# Altium PCB PCB2.PcbDoc
Units mil, origin at the board's own origin, x right, y up, seen from the top; angles counter-clockwise.
Board outline 6000 x 4000 mil, 2 copper layers (Top Layer, Bottom Layer); 30 components, 20 nets, 126 pads, 1 vias.
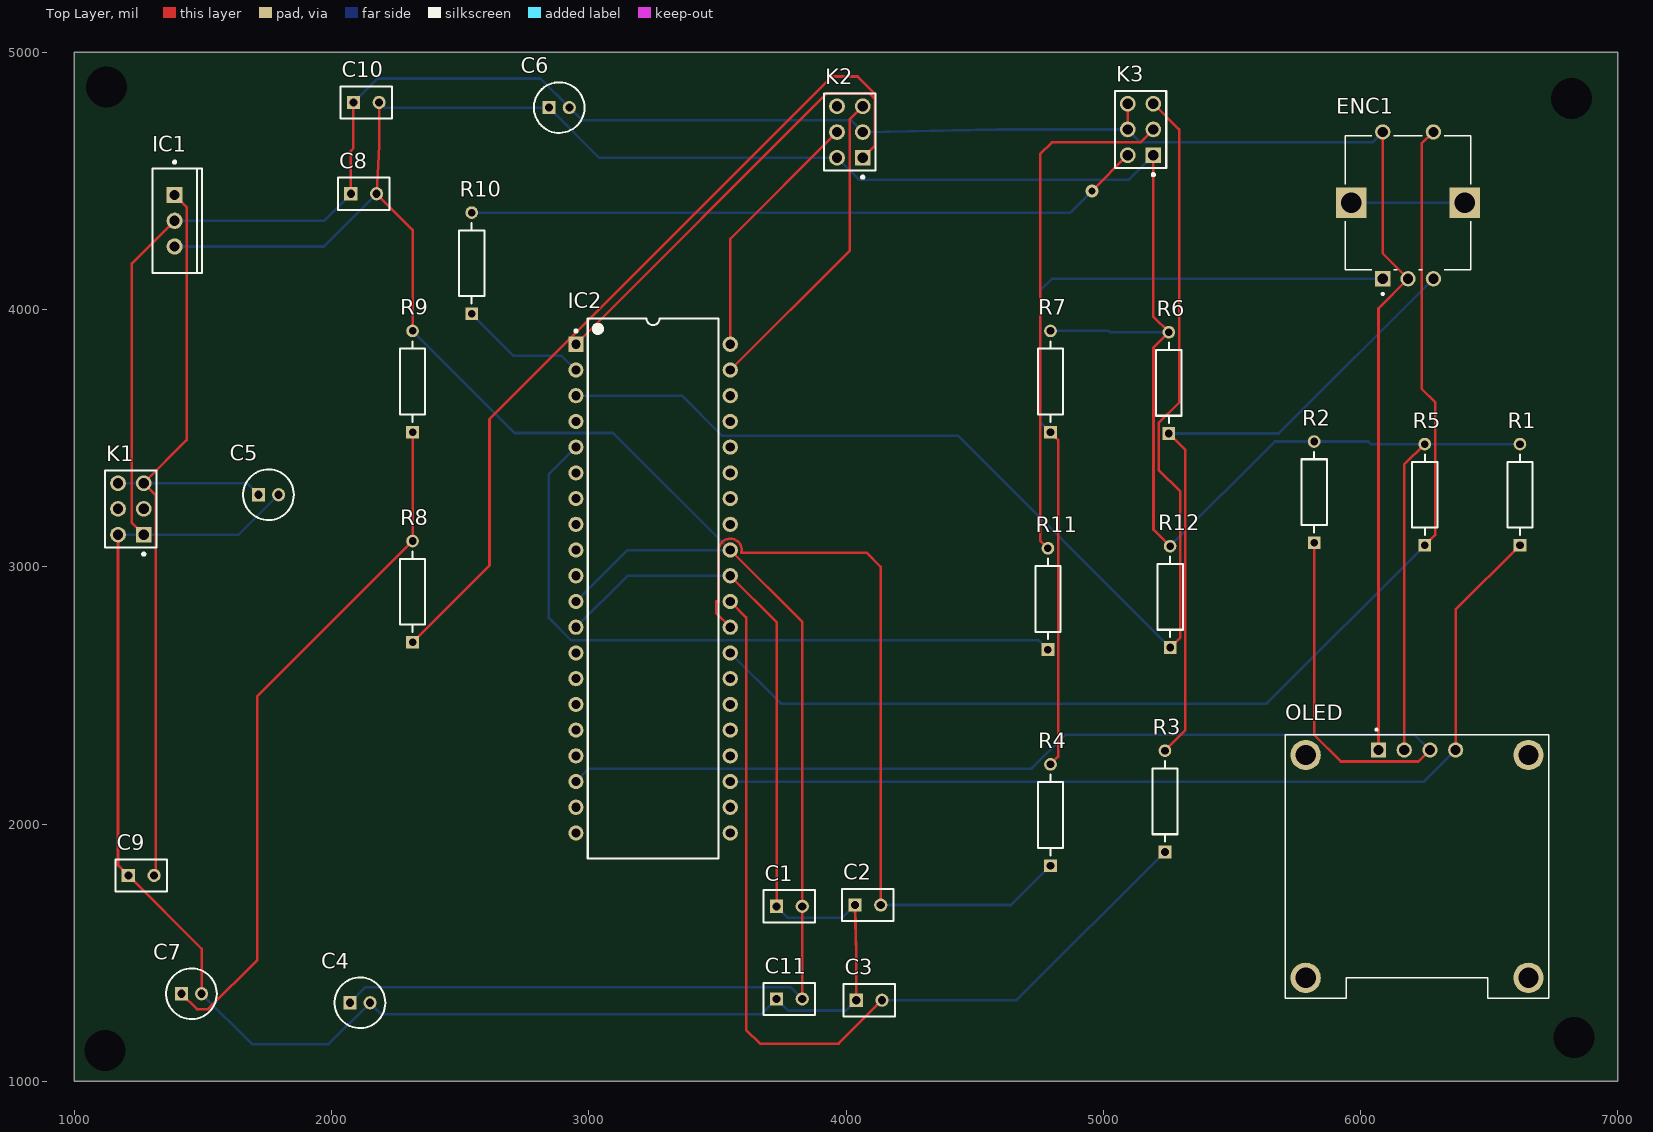
[diagram p0: Top Layer view]
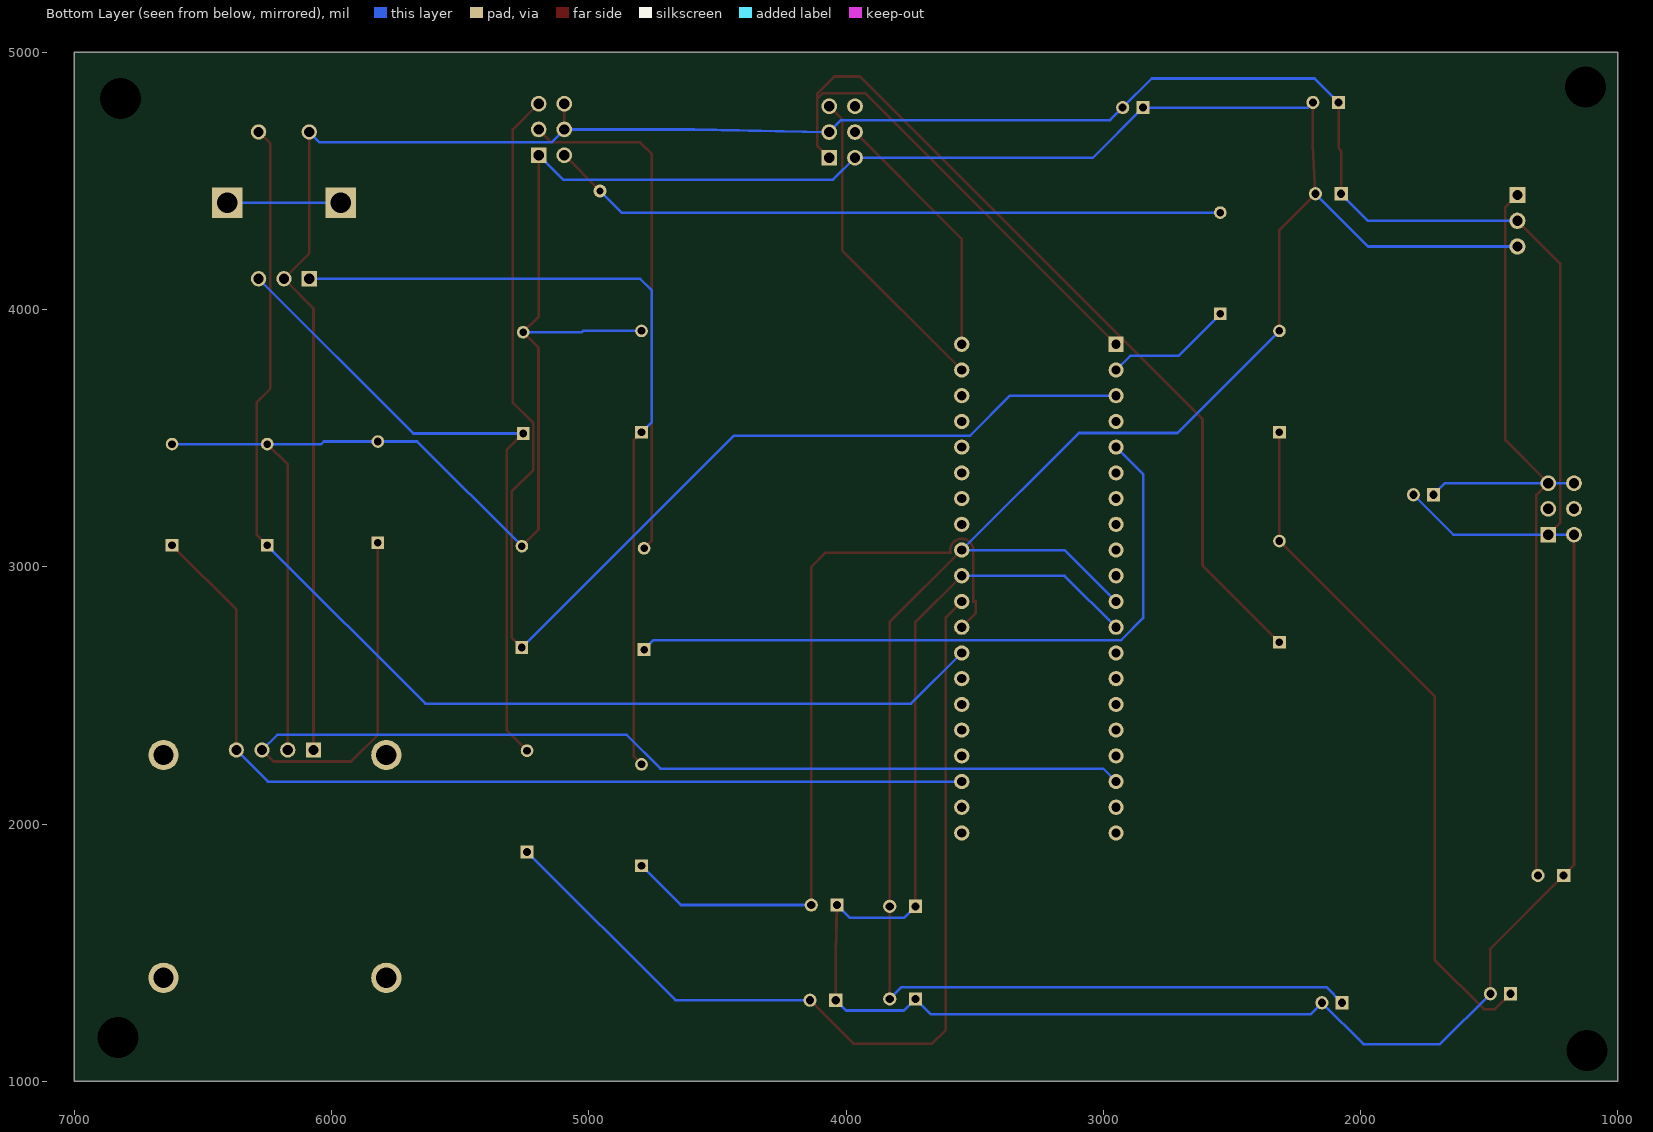
[diagram p1: Bottom Layer view, seen from below]
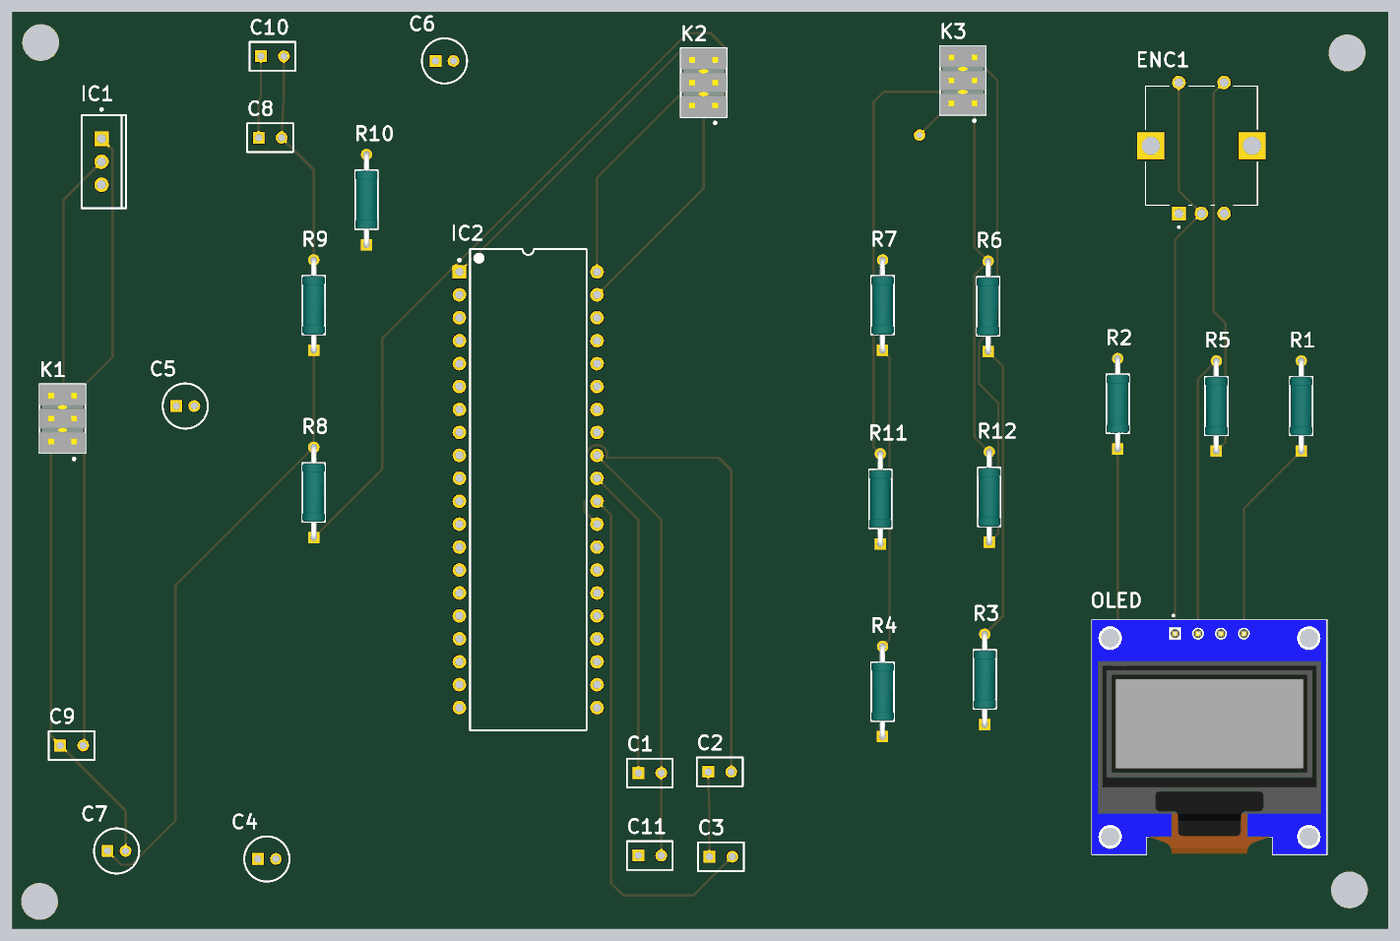
[diagram p2: 3D render of the assembled board from above, using the file's embedded part models]

## Layer stack, top to bottom
Top Solder: solder mask 0.4, Solder Resist, Dk 3.5
Top Layer: signal copper 1.4
Dielectric 1: dielectric 12.6, FR-4, Dk 4.8
Bottom Layer: signal copper 1.4
Bottom Solder: solder mask 0.4, Solder Resist, Dk 3.5

## Board outline
1000,1000 7000,1000 7000,5000 1000,5000

## Design rules (kind name [scope] priority, off if disabled: settings)
Clearance [All] p1: gap=10 ignorepadtopadclearanceinfootprint=FALSE
HoleSize [All] p1: absolutevalues=TRUE maxlimit=200 minlimit=1 maxpercent=80.000 minpercent=20.000
PolygonConnect [All] p1: connectstyle=Relief reliefconductorwidth=10 reliefentries=4 polygonreliefangle="90 Angle" airgapwidth=10
RoutingVias [All] p1: holewidth=28 width=50 viastyle="Through Hole" minholewidth=28 minwidth=50 maxholewidth=28 maxwidth=50
SolderMaskExpansion [All] p1: expansion=4 istentingtop=FALSE
Width [All] p1: maxlimit=10 minlimit=10 preferedwidth=10
29 further rules are at their usual default settings.

## Components (designator, comment, footprint, x,y, rotation, side; value= is the part's Value field where it differs from the comment)
C1 "100nF" "Capacitor 100nF" 3780,1680 r0 top
C2 "100nF" "Capacitor 100nF" 4085,1685 r0 top
C3 "100nF" "Capacitor 100nF" 4090,1315 r0 top
C4 "10µF" "Capacitor 10µF" 2110.63,1305 r0 top
C5 "10µF" "Capacitor 10µF" 1755,3280 r0 top
C6 "10µF" "Capacitor 10µF" 2885,4785 r0 top
C7 "1µF" "Capacitor 10µF" 1455.63,1340 r0 top
C8 "100nF" "Capacitor 100nF" 2125,4450 r0 top
C9 "100nF" "Capacitor 100nF" 1260,1800 r0 top
C10 "100nF" "Capacitor 100nF" 2135,4805 r0 top
C11 "100nF" "Capacitor 100nF" 3780,1320 r0 top
ENC1 "EC12E2424407" ENC1_PCB 6185,4415 r0 top
IC1 "7805" MC7805CTG 1390,4345 r0 top
IC2 "PIC18F45K22-E/P" PIC18F45K22-E/P 3250,2915 r0 top
K1 "" Pin3x2 1220,3225 r90 top
K2 "TSW-103-08-L-D" Pin3x2 4015,4690 r90 top
K3 "TSW-103-08-L-D" Pin3x2 5145,4700 r90 top
OLED "OLED" OLED 6220,1835 r0 top
R1 "4K7" Resistor 6620,3280 r90 top
R2 "4K7" Resistor 5820,3290 r90 top
R3 "4K7" Resistor 5240,2088.15 r90 top
R4 "4K7" Resistor 4795,2035 r90 top
R5 "4K7" Resistor 6250,3280 r90 top
R6 "4K7" Resistor 5255,3715 r90 top
R7 "4K7" Resistor 4795,3720 r90 top
R8 "1K" Resistor 2315,2903.15 r90 top
R9 "1K" Resistor 2315,3720 r90 top
R10 "1K" Resistor 2545,4180 r90 top
R11 "3K3" Resistor 4785,2875 r90 top
R12 "10K" Resistor 5260,2883.15 r90 top

## Footprints (in the part's own frame and the unit in brackets; to place one, negate y for a bottom-side part, rotate by r counter-clockwise, add the part's x,y. Pads: shape width x height; smd on the part's side, far side on the other; paste and mask are expansions set on the pad)
"Capacitor 10µF" [mm] "THD, 2-Leads, Dia 5mm, Body Length 11mm"
  rect 1.3x1.3 hole 0.8: 1(-1,0)
  round 1.3 hole 0.8: 2(1,0)
  silkscreen extent -2.5,-2.5 2.5,2.5, body extent -2.5,-2.5 2.5,2.5, height 12
"Capacitor 100nF" [mm] "THD, 2-Leads, Body 5.08x3.18mm"
  rect 1.3x1.3 hole 0.8: 1(-1.27,0)
  round 1.3 hole 0.8: 2(1.27,0)
  silkscreen extent -2.54,-1.59 2.54,1.59, body extent -2.54,-1.59 2.54,1.59, height 7.36
ENC1_PCB [mm]
  rect 1.508x1.508 hole 1: A(-2.5,-7.5)
  round 1.508 hole 1: B(2.5,-7.5) C(0,-7.5) D(-2.5,7) E(2.5,7)
  rect 3x3 hole 2: S1(-5.6,0) S2(5.6,0)
  silkscreen extent -6.2,-9.1 6.2,6.6
MC7805CTG [mm] "FM, 3-Leads, Body 10.3x4.85mm, Pitch 2.54mm"
  rect 1.6x1.6 hole 1: 1(0,2.54)
  round 1.6 hole 1: 2(0,0) 3(0,-2.54)
  silkscreen extent -2.19,-5.15 2.72,5.92, body extent -2.16,-5.15 2.69,5.15, height 19.68
OLED [mm] "MODULE_DM-OLED096-636"
  rect 1.508x1.508 / inner round 1.508 / far side rect 1.508x1.508 hole 1: 1(-3.81,11.5)
  round 1.508 hole 1: 2(-1.27,11.5) 3(1.27,11.5) 4(3.81,11.5)
  round 3 hole 2: S1(-11,11) S2(11,11) S3(11,-11) S4(-11,-11)
  silkscreen extent -13,-13 13,13.6, body extent -13,-13 13,13, height 5.66
PIC18F45K22-E/P [mm] "PDIP, 40-Leads, Body 51.75x13.53mm, Pitch 2.54mm"
  rect 1.5x1.5 hole 0.9: 1(-7.62,24.13)
  round 1.5 hole 0.9: 2(-7.62,21.59) 3(-7.62,19.05) 4(-7.62,16.51) 5(-7.62,13.97) 6(-7.62,11.43) 7(-7.62,8.89) 8(-7.62,6.35) 9(-7.62,3.81) 10(-7.62,1.27) 11(-7.62,-1.27) 12(-7.62,-3.81) 13(-7.62,-6.35) 14(-7.62,-8.89) 15(-7.62,-11.43) 16(-7.62,-13.97) 17(-7.62,-16.51) 18(-7.62,-19.05) 19(-7.62,-21.59) 20(-7.62,-24.13) 21(7.62,-24.13) 22(7.62,-21.59) 23(7.62,-19.05) 24(7.62,-16.51) 25(7.62,-13.97) 26(7.62,-11.43) 27(7.62,-8.89) 28(7.62,-6.35) 29(7.62,-3.81) 30(7.62,-1.27) 31(7.62,1.27) 32(7.62,3.81) 33(7.62,6.35) 34(7.62,8.89) 35(7.62,11.43) 36(7.62,13.97) 37(7.62,16.51) 38(7.62,19.05) 39(7.62,21.59) 40(7.62,24.13)
  silkscreen extent -7.74,-26.65 6.45,26.65, body extent -7.76,-26.6 7.76,26.6, height 6.35
Pin3x2 [mm] "CONN, 6-Leads, Body 7.62x5.08mm, Pitch 2.54mm"
  rect 1.55x1.55 hole 1.02: 1(-2.54,-1.27)
  round 1.55 hole 1.02: 2(-2.54,1.27) 3(0,-1.27) 4(0,1.27) 5(2.54,-1.27) 6(2.54,1.27)
  silkscreen extent -4.58,-2.54 3.81,2.54, body extent -3.81,-2.54 3.81,2.54, height 8.38
Resistor [mm]
  rect 1.25x1.25 hole 0.75 paste-2539.97 mask+0: 1(-5,0)
  round 1.25 hole 0.75 paste-2539.97 mask+0: 2(5,0)
  silkscreen extent -3.97,-1.25 3.97,1.25, body extent -5.72,-1.35 5.72,1.35, height 0.25

## Part data
C1 C2 C3 C8 C9 C10 C11: library part "Capacitor 100nF", "Radial Leaded Multilayer Ceramic Capacitor, 0.1 uF, +/- 10%, 50 V, -55 to 125 degC, 2-Pin THD, RoHS, Tape and Reel", Case\Package=SOT-23-5, Dropout Voltage="260 mV", Max Input Voltage="8 V", Max Operating Temperature="85 degC", Max Power Dissipation="250 mW", Min Operating Temperature="-40 degC", Output Current="150 mA", Output Voltage="5 V", Package Quantity=3000, ComponentLink1Description="Manufacturer URL", ComponentLink1URL=http://www.kemet.com/, ComponentLink2Description=Datasheet, ComponentLink2URL=http://www.kemet.com/docfinder?Partnumber=C320C104K5R5TA, DatasheetVersion=Dec-15, Height="1.3 mm", Length="3 mm", Mount="Surface Mount", Outputs=1, PackageDescription="2-Pin Through Hole Device, Body 5.08 x 3.18 mm, Pitch 2.54 mm", PackageReference=CAPR51-254-508X318X736, Packaging="Tape and Reel", Pins=5, Radiation Hardening=No, RoHSCompliant=true, Width="1.8 mm"
C4 C5 C6: library part "Capacitor 10µF", "Aluminum Electrolytic Capacitor, 10 uF, +/- 20%, 50 V, -40 to 85 degC, 2-Pin THD, RoHS, Bulk", Capacitance=10uF, Case/Package=Radial, Dielectric Material=Aluminium, Leakage Current=3uA, Manufacturer=Panasonic, Max Operating Temperature=85degC, Min Operating Temperature=-40degC, Package Description="2-Pin Radial Lead, Dia 5 mm, Height 12 mm", Package Quantity=200, Package Reference=CAPPR55-200-1100X500X1200, Ripple Current=65mA, Tolerance=20%, Voltage=50V, Datasheet URL=https://industrial.panasonic.com/cdbs/www-data/pdf/RDF0000/ABA0000C1218.pdf, Datasheet Version="Rev. 05, 10/2016", Diameter=5mm, Dissipation Factor=0.12%, Height=11mm, Height - Seated (Max)=0.472inch, Lead Diameter=0.5mm, Lead Free=LeadFree, Lead Pitch=2mm, Lead/Base Style=Straight, Length=11mm, Life (Hours)=2000Hour, Manufacturer URL=http://www.panasonic.com/, Mount=ThroughHole, Number of Pins=2, Packaging=Bulk, Radiation Hardening=No, REACH SVHC=NoSVHC, Ripple Current (AC)=65mA, RoHSCompliant=true, Termination=Radial, Voltage Rating=50V, Voltage Rating (DC)=50V
C7: library part "Capacitor 10µF", "Aluminum 1µ Electrolytic Capacitor, 1 uF, +/- 20%, 50 V, -40 to 85 degC, 2-Pin THD, RoHS, Bulk", Capacitance=10uF, Case/Package=Radial, Dielectric Material=Aluminium, Leakage Current=3uA, Manufacturer=Panasonic, Max Operating Temperature=85degC, Min Operating Temperature=-40degC, Package Description="2-Pin Radial Lead, Dia 5 mm, Height 12 mm", Package Quantity=200, Package Reference=CAPPR55-200-1100X500X1200, Ripple Current=65mA, Tolerance=20%, Voltage=50V, Datasheet URL=https://industrial.panasonic.com/cdbs/www-data/pdf/RDF0000/ABA0000C1218.pdf, Datasheet Version="Rev. 05, 10/2016", Diameter=5mm, Dissipation Factor=0.12%, Height=11mm, Height - Seated (Max)=0.472inch, Lead Diameter=0.5mm, Lead Free=LeadFree, Lead Pitch=2mm, Lead/Base Style=Straight, Length=11mm, Life (Hours)=2000Hour, Manufacturer URL=http://www.panasonic.com/, Mount=ThroughHole, Number of Pins=2, Packaging=Bulk, Radiation Hardening=No, REACH SVHC=NoSVHC, Ripple Current (AC)=65mA, RoHSCompliant=true, Termination=Radial, Voltage Rating=50V, Voltage Rating (DC)=50V
ENC1: library part ENC1, "Encoders 12mm 24 Res 24 Dtent 20mm op sectn w/ sw", Package=None, Availability=Unavailable, MF=ALPS, MP=EC12E2424407, Price=None, SnapEDA_Link=https://www.snapeda.com/parts/EC12E2424407/ALPS/view-part/87294/?ref=snap
IC1: library part MC7805CTG, "Positive Voltage Regulator, 1 A, 5 V, 0 to 125 degC, 3-Pin TO-220, RoHS, Tube", Current, Output, Maximum=1A, Current, Quiescent Supply=6.5mA, Current, Supply=3.2mA, Dropout Voltage=2V, Manufacturer="ON Semiconductor", Package Description="3-Pin Flange Mount, Vertical Straight Lead, Body 9.97 x 4.445 mm, Pitch 2.54 mm", Package Reference=TO-220-3-221AB-01, Package Type=TO-220, Package Version="Rev. A, 11/2010", Resistance, Thermal, Junction to Case=5degC/W, Temperature, Operating, Maximum=+125degC, Temperature, Operating, Minimum=0degC, Temperature, Operating, Range=0to+125degC, Voltage, Input Range=Maximumof35V, Voltage, Input, High Level=35V, Voltage, Noise=10μV/V, Voltage, Output=5V, Datasheet URL=http://www.onsemi.com/pub_link/Collateral/MC7800-D.PDF, Datasheet Version="Rev. 27, 11/2014", Dimensions=10.28x4.82x15.75mm, Dropout Voltage Measurement Current=1A, Height=15.75mm, Length=10.28mm, Line Regulation=20mV, Load Regulation=25mV, Manufacturer URL=http://www.onsemi.com/, Mounting Type=ThroughHole, Number of Outputs=1, Number of Pins=3, Output Type=Fixed, Polarity=Positive, Regulation, Line=0.5mV, Regulation, Load=1.3mV, Regulator Function=Standard, Regulator Type=PositiveVoltageOut, Type=VoltageRegulator, Voltage, Dropout=2V, Voltage, Supply=35V, Width=4.82mm
IC2: "Low-Power, High-Performance Microcontroller with XLP Technology, 64 MHz, 35 I/O, -40 to 125 degC, 40-pin PDIP (P40), Tube", Manufacturer=Microchip, Operation Voltage Range="2.3V - 5.5V", # of A/D Channels=28, ComponentLink1Description=Datasheet, ComponentLink1URL=http://ww1.microchip.com/downloads/en/DeviceDoc/41412F.pdf, ComponentLink2Description="Package Specification", ComponentLink2URL=http://www.microchip.com/stellent/groups/techpub_sg/documents/packagingspec/en012702.pdf, ComponentLink3Description="URL Link1", ComponentLink3URL="Product URL:http://www.microchip.com/datasheet/PIC18F45K22", DatasheetVersion="Rev. F", Digital Communication="2 -A/E/USART, 2 -MSSP(SPI/I2C)", EEPROM Data Memory (bytes)=256, I/O Pins=35, Internal Oscillator="16 MHz, 31 kHz", Max. CPU Speed MHz=64, Memory Type=Flash, Mounting Technology="Through Hole", PackageDescription="40-Lead Plastic Dual In-Line Package, Body 51.75 x 13.53 mm, Pitch 2.54 mm", PackageReference=PDIP-P40, PackageVersion="C04-016B, 04/2013", Packing=TUBE, PartNumber=PIC18F45K22-E/P, Program Memory KBytes=32, Program Memory KWords=16, RAM=1536, RoHS=TRUE, Timers="3 - 8-bit, 4 - 16-bit"
K1 K2 K3: library part Connector3x2, "Male Header, Pitch 2.54 mm, 2 x 3 Position,  8.9 x 15.22 x 11.95 mm", Manufacturer=Samtec, Max Operating Temperature="125 degC", Min Operating Temperature="-55 degC", ComponentLink1Description="Manufacturer URL", ComponentLink1URL=http://www.samtec.com/, ComponentLink2Description=Datasheet, ComponentLink2URL=https://datasheet.ciiva.com/25618/0900766b81154476-25618436.pdf, ComponentLink3Description="Package Specification", ComponentLink3URL=http://suddendocs.samtec.com/prints/tsw-xxx-xx-x-x-xx-xxx-footprint.pdf, DatasheetVersion=04/2012, Lead Pitch="2.54 mm", Mount="Through Hole", Mounting Technology="Through Hole", PackageDescription="Male Header, Pitch 2.54 mm, 2 x 3 Position, Height 8.38 mm, Tail Length 5.08 mm", PackageReference=TSW-103-08-L-D, RoHSCompliant=true
OLED: "0.96â€ 128 X 64 MONOCHROME GRAPHIC OLED DISPLAY MODULE - I2C", Package=Package, Check_prices=https://www.snapeda.com/parts/DM-OLED096-636/Display+Module/view-part/?ref=eda, MF="Display Module", MP=DM-OLED096-636, SnapEDA_Link=https://www.snapeda.com/parts/DM-OLED096-636/Display+Module/view-part/?ref=snap
R1 R2 R3 R4 R6 R7: library part Resistor, "RES 4K7 OHM 0.6W 1% AXIAL", Case/Package=Axial, Max Operating Temperature=155°C, Max Power Dissipation=600mW, Min Operating Temperature=-55°C, Package Quantity=5000, Resistance=1kR, Resistance Tolerance=1%, Resistor Type="Metal Film", Temperature Coefficient=50ppm/°C, Voltage Rating=350V, Construction=Cylindrical, Contact Plating=Tin, Diameter=2.5mm, Lead Diameter=0.6mm, Lead Free="Lead Free", Length=6.5mm, Military Standard=Not, Mount="Through Hole", Number of Pins=2, Number of Terminations=2, Packaging="Tape and Reel", Power Rating=600mW, Radiation Hardening=No, RoHS Compliant=Yes, Series=MRS25, Technology="THIN FILM", Termination=Axial, Tolerance=1%, Voltage Rating (DC)=350V, Weight=0.00776oz, Width=2.5mm
R5: library part Resistor, "RES ?K OHM 0.6W 1% AXIAL", Case/Package=Axial, Max Operating Temperature=155°C, Max Power Dissipation=600mW, Min Operating Temperature=-55°C, Package Quantity=5000, Resistance=1kR, Resistance Tolerance=1%, Resistor Type="Metal Film", Temperature Coefficient=50ppm/°C, Voltage Rating=350V, Construction=Cylindrical, Contact Plating=Tin, Diameter=2.5mm, Lead Diameter=0.6mm, Lead Free="Lead Free", Length=6.5mm, Military Standard=Not, Mount="Through Hole", Number of Pins=2, Number of Terminations=2, Packaging="Tape and Reel", Power Rating=600mW, Radiation Hardening=No, RoHS Compliant=Yes, Series=MRS25, Technology="THIN FILM", Termination=Axial, Tolerance=1%, Voltage Rating (DC)=350V, Weight=0.00776oz, Width=2.5mm
R8 R9 R10: library part Resistor, "RES 1K OHM 0.6W 1% AXIAL", Case/Package=Axial, Max Operating Temperature=155°C, Max Power Dissipation=600mW, Min Operating Temperature=-55°C, Package Quantity=5000, Resistance=1kR, Resistance Tolerance=1%, Resistor Type="Metal Film", Temperature Coefficient=50ppm/°C, Voltage Rating=350V, Construction=Cylindrical, Contact Plating=Tin, Diameter=2.5mm, Lead Diameter=0.6mm, Lead Free="Lead Free", Length=6.5mm, Military Standard=Not, Mount="Through Hole", Number of Pins=2, Number of Terminations=2, Packaging="Tape and Reel", Power Rating=600mW, Radiation Hardening=No, RoHS Compliant=Yes, Series=MRS25, Technology="THIN FILM", Termination=Axial, Tolerance=1%, Voltage Rating (DC)=350V, Weight=0.00776oz, Width=2.5mm
R11: library part Resistor, "RES 3K3 OHM 0.6W 1% AXIAL", Case/Package=Axial, Max Operating Temperature=155°C, Max Power Dissipation=600mW, Min Operating Temperature=-55°C, Package Quantity=5000, Resistance=1kR, Resistance Tolerance=1%, Resistor Type="Metal Film", Temperature Coefficient=50ppm/°C, Voltage Rating=350V, Construction=Cylindrical, Contact Plating=Tin, Diameter=2.5mm, Lead Diameter=0.6mm, Lead Free="Lead Free", Length=6.5mm, Military Standard=Not, Mount="Through Hole", Number of Pins=2, Number of Terminations=2, Packaging="Tape and Reel", Power Rating=600mW, Radiation Hardening=No, RoHS Compliant=Yes, Series=MRS25, Technology="THIN FILM", Termination=Axial, Tolerance=1%, Voltage Rating (DC)=350V, Weight=0.00776oz, Width=2.5mm
R12: library part Resistor, "RES 10K OHM 0.6W 1% AXIAL", Case/Package=Axial, Max Operating Temperature=155°C, Max Power Dissipation=600mW, Min Operating Temperature=-55°C, Package Quantity=5000, Resistance=1kR, Resistance Tolerance=1%, Resistor Type="Metal Film", Temperature Coefficient=50ppm/°C, Voltage Rating=350V, Construction=Cylindrical, Contact Plating=Tin, Diameter=2.5mm, Lead Diameter=0.6mm, Lead Free="Lead Free", Length=6.5mm, Military Standard=Not, Mount="Through Hole", Number of Pins=2, Number of Terminations=2, Packaging="Tape and Reel", Power Rating=600mW, Radiation Hardening=No, RoHS Compliant=Yes, Series=MRS25, Technology="THIN FILM", Termination=Axial, Tolerance=1%, Voltage Rating (DC)=350V, Weight=0.00776oz, Width=2.5mm

## Free pads (board coordinates)
  round 0 hole 160: 22(1125,4865) 23(1120,1120) 24(6820,4820) 25(6830,1170)

## Via types
v1: diameter 50, hole 28, Top Layer to Bottom Layer, 1 vias

## Nets (pads, with @x,y where several pads share a name; then routed paths per layer and width w, separated by ;. In a path a pad name is that pad's centre, name@x,y a point inside that pad or via, vN(x,y) a via of type N, cw(c..) or ccw(c..) an arc to the next point about the centre after c; other vN are vias at no path point)
GND: C1.1 C2.1 C3.1 C4.2 C5.2 C6.2 C7.2 C8.1 C9.1 C10.1 C11.1 ENC1.C ENC1.D IC1.2 IC2.12 IC2.31 K1.1 K1.2 K2.3 K3.4 K3.6 OLED.1 | length 17287.1
  Top Layer w10: K1.2 1170,1840 C9.1 1495,1515 C7.2 ; K1.1 1224,3171 1224,4179 IC1.2 ; C8.1 2075,4617 2085,4627 C10.1 ; IC2.31 3730,2785 C1.1 ; C2.1 4040,1495 C3.1 ; K3.4 K3.6 ; OLED.1 6070,4004.72 ENC1.C 6086.57,4218.15 ENC1.D
  Bottom Layer w10: K1.2 K1.1 1639.37,3125 C5.2 ; IC1.2 1970,4345 C8.1 ; C7.2 1691,1144 1989,1144 C4.2 2195,1260 3670,1260 C11.1 3775,1275 4000,1275 C3.1 ; C10.1 2178,4898 2811.37,4898 C6.2 2973.37,4736 4019,4736 K2.3 4590,4700 K3.4 5145,4650 6045.98,4650 ENC1.D ; IC2.12 3150,2965 IC2.31 ; C1.1 3775,1635 3985,1635 C2.1
NetC1_2: C1.2 C4.1 C6.1 C8.2 C10.2 C11.2 IC1.3 IC2.11 IC2.32 K2.2 K3.1 OLED.2 R1.2 R2.2 R5.2 R6.2 R7.2 R9.2 R12.2 | length 15737.9
  Top Layer w10: C10.2 2185,4638 C8.2 2315,4310 R9.2 ; IC2.32 3830,2785 C1.2 C11.2 ; K3.1 5195,3971.85 R6.2 5195.39,3852.24 5195.39,3144.61 R12.2 ; OLED.2 6170,3396.85 R5.2
  Bottom Layer w10: IC1.3 1970,4245 C8.2 ; C4.1 2132.26,1366 3784,1366 C11.2 ; C10.2 2205,4785 C6.1 3040.63,4590 K2.2 4050,4505 5100,4505 K3.1 ; R9.2 2711.85,3520 3095,3520 IC2.32 3150,3065 IC2.11 ; R7.2 5022,3916.85 5027,3911.85 R6.2 ; R12.2 5666.85,3486.85 R2.2 6030,3486.85 6040,3476.85 R5.2 R1.2
NetC2_2: C2.2 IC2.29 R4.1 | length 3086
  Top Layer w10: IC2.29 3495,2820 3495,2865 3505.47,2865 3505.47,3065 cw(c3550,3065) 3593.41,3055.09 4080,3055.09 4135,3000.09 C2.2
  Bottom Layer w10: C2.2 4641.85,1685 R4.1
NetC3_2: C3.2 IC2.30 R3.1 | length 3649.8
  Top Layer w10: IC2.30 3612,2803 3612,1200 3666,1146 3971,1146 C3.2
  Bottom Layer w10: C3.2 4663.7,1315 R3.1
NetC5_1: C5.1 C9.2 IC1.1 K1.5 K1.6 | length 3319.5
  Top Layer w10: C9.2 1316,1806 1316,3279 K1.5 1437,3492 1437,4398 IC1.1
  Bottom Layer w10: K1.6 K1.5 1670.63,3325 C5.1
NetC7_1: C7.1 R8.2 R9.1 | length 2701
  Top Layer w10: C7.1 1476.26,1280 1520,1280 1712,1472 1712,2497 R8.2 R9.1
NetENC1_A: ENC1.A R4.2 R7.1 | length 3234.5
  Top Layer w10: R4.2 4825,2261.85 4825,3493.15 R7.1
  Bottom Layer w10: R7.1 4755,3563.15 4755,4074.72 4800,4119.72 ENC1.A
NetENC1_B: ENC1.B R3.2 R6.1 | length 2570.5
  Top Layer w10: R3.2 5319.61,2364.61 5319.61,3453.54 R6.1
  Bottom Layer w10: R6.1 5681.85,3518.15 ENC1.B
NetENC1_E: ENC1.E IC2.28 R5.1 | length 4700.8
  Top Layer w10: R5.1 6290,3123.15 6290,3640 6238,3692 6238,4645.16 ENC1.E
  Bottom Layer w10: IC2.28 3747,2468 5634.85,2468 R5.1
NetENC1_S1: ENC1.S1 ENC1.S2 | length 440.9
  Bottom Layer w10: ENC1.S1 ENC1.S2
NetIC2_1: IC2.1 K2.1 R8.1 | length 4909.8
  Top Layer w10: R8.1 2614,3005.3 2614,3574 3946,4906 4045,4906 4111,4840 4111,4820 ; IC2.1 3925,4840 4091,4840 4111,4820 ; K2.1 4111,4636 4111,4820
NetIC2_2: IC2.2 R10.1 | length 495.4
  Bottom Layer w10: R10.1 2708.15,3820 2895,3820 IC2.2
NetIC2_3: IC2.3 K3.5 R12.1 | length 4954.8
  Top Layer w10: K3.5 5295,4700 5295,3637.61 5215.39,3558 5215.39,3376.61 5299.61,3292.39 5299.61,2725.91 R12.1
  Bottom Layer w10: IC2.3 3362,3665 3517,3510 4436.3,3510 R12.1
NetIC2_5: IC2.5 R11.1 | length 2699
  Bottom Layer w10: IC2.5 2845,3360 2845,2800 2930,2715 4748.15,2715 R11.1
NetIC2_18: IC2.18 OLED.3 R2.1 | length 4677.7
  Top Layer w10: R2.1 5820,2347 5924,2243 6225.24,2243 OLED.3
  Bottom Layer w10: IC2.18 3000,2215 4721,2215 4853,2347 6210.76,2347 OLED.3
NetIC2_23: IC2.23 OLED.4 R1.1 | length 3769.8
  Top Layer w10: OLED.4 6370,2833.15 R1.1
  Bottom Layer w10: IC2.23 6247.24,2165 OLED.4
NetIC2_39: IC2.39 K2.5 | length 1238.3
  Top Layer w10: IC2.39 4015,4230 4015,4740 K2.5
NetIC2_40: IC2.40 K2.4 | length 996.9
  Top Layer w10: IC2.40 3550,4275 K2.4
NetK3_2: K3.2 R10.2 | length 2642.4
  Top Layer w10: v1(4956,4461) K3.2
  Bottom Layer w10: R10.2 4871.85,4376.85 v1(4956,4461)
NetK3_3: K3.3 R11.2 | length 2024.9
  Top Layer w10: R11.2 4755,3101.85 4755,4605 4800,4650 5145,4650 K3.3
pads on no net: IC2.4 IC2.6 IC2.7 IC2.8 IC2.9 IC2.10 IC2.13 IC2.14 IC2.15 IC2.16 IC2.17 IC2.19 IC2.20 IC2.21 IC2.22 IC2.24 IC2.25 IC2.26 IC2.27 IC2.33 IC2.34 IC2.35 IC2.36 IC2.37 IC2.38 K1.3 K1.4 K2.6 OLED.S1 OLED.S2 OLED.S3 OLED.S4

## Other copper
Top Layer: